# Altium PCB MB1360.PcbDoc (part 2 of 3)
Units mil, origin at the board's own origin, x right, y up, seen from the top; angles counter-clockwise.
Board outline 2760.94 x 3253.06 mil, 2 copper layers (Top Layer, Bottom Layer), stack 61.811 mil thick; 138 components, 141 nets, 535 pads, 416 vias.
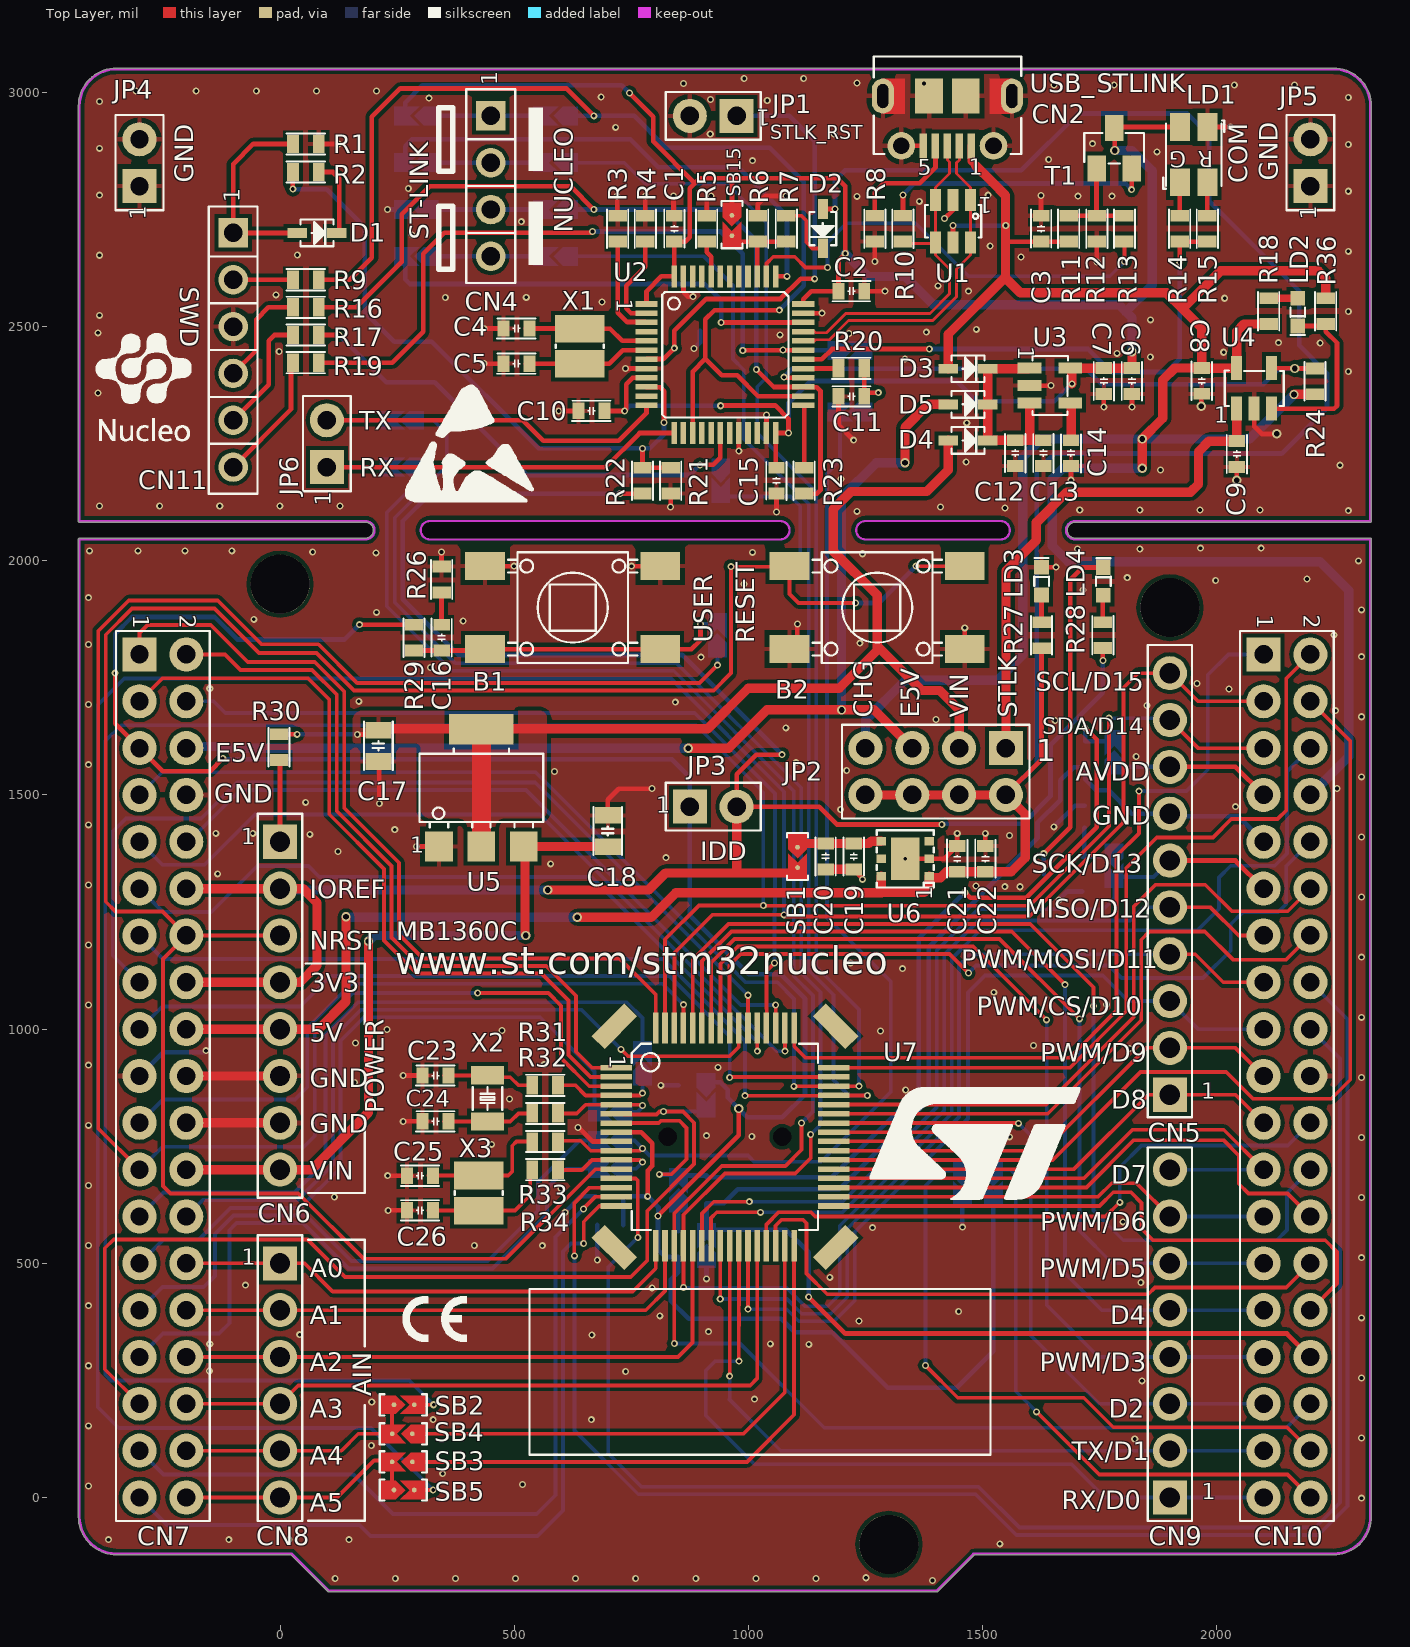
[diagram p0: Top Layer view]

## Via types
v1: diameter 15, hole 8, Top Layer to Bottom Layer, tented both sides, 398 vias
v2: diameter 20, hole 12, Top Layer to Bottom Layer, tented both sides, 18 vias

## Nets (pads, with @x,y where several pads share a name; then routed paths per layer and width w, separated by ;. In a path a pad name is that pad's centre, name@x,y a point inside that pad or via, vN(x,y) a via of type N, cw(c..) or ccw(c..) an arc to the next point about the centre after c; other vN are vias at no path point) (continued)
3V3_STLK: (continued)
  Top Layer w10: C10.2@696.5,2320 v1(736,2320) 739,2323 739,2377 752.79,2390.79 U2.9@782.68,2390.79 ; v1(746,2999) 796.64,2948.36 796.64,2895.4 885.94,2806.09 ; U2.1@782.68,2548.27 782.68,2575.68 814.32,2607.32 U2.48@841.73,2607.32 842,2607.59 C1.2@842,2681.44 865.44,2681.44 875,2691 875,2795.15 885.94,2806.09 ; v1(941,2331) 941.68,2331.68 1057.32,2331.68 1085.62,2303.38 v1(1085.62,2272.68) U2.24@1058.27,2272.68 C15.2@1058.27,2204.23 ; SB15.1@965,2737.4 965,2816.76 ; U2.36@1117.32,2548.27 1117.32,2558.32 1134.68,2575.68 C2.2@1188.5,2575.68 ; C2.2@1192.44,2575.68 1192.44,2641.55 v1(1206.89,2656) 1206.89,2800.07 1190.2,2816.76 965,2816.76 ; v2(1782,2876) 1782,2920.37 1787.68,2926.06 LD1.4@1921.47,2926.06 ; 885.94,2806.09 896.61,2816.76 965,2816.76
  Top Layer w16: U3.5@1689.28,2411.4 U3.5@1690.77,2409.91
  Top Layer w20: U3.5@1689.28,2411.4 C6.2@1818.09,2411.4 ; v1(1690.77,2377.77) U3.5@1690.77,2409.91 ; C6.2@1819.02,2411.5 v2(1819.02,2445.98)
  Bottom Layer w10: SB6.2@267.25,2950 267.25,2978.25 304,3015 730,3015 v1(746,2999) ; v1(736,2320) 747,2331 v1(941,2331) ; v1(1085.62,2272.68) 1085.62,2336.76 1132.86,2384 1444.36,2384 1487.68,2340.68 1653.68,2340.68 v1(1690.77,2377.77)
  Bottom Layer w20: v1(1206.89,2656) 1255.89,2607 1335,2607 1395,2547 1790.92,2547 1806,2531.92 ; v2(1782,2876) 1818.79,2876 1862,2832.79 1862,2587.92 1806,2531.92 ; v2(1819.02,2445.98) 1819.02,2518.91 1806,2531.92
5V: C21.2 C22.2 CN6.5 CN7.18 D2.1 JP2.2 JP2.4 JP2.6 JP2.8 R27.1 U6.1 U6.6 | length 5940.5
  Top Layer w10: D2.1@1159,2751.13 v1(1184.87,2751.13) ; JP2.2@1550,1500 1626,1576 R27.1@1626,1813.44
  Top Layer w20: CN7.18@-200,1000 CN6.5@0,1000 82,1000 141,1059 v2(141,1240) ; v2(635,1239) 793,1239 845.32,1291.32 1284.32,1291.32 1285,1292 ; JP2.8@1250,1500 JP2.6@1350,1500 JP2.4@1450,1500 JP2.2@1550,1500 1591,1459 1591,1366 1561.13,1336.13 C22.2@1506,1336.13 C21.2@1446,1336.13 1423.13,1336.13 1410.18,1323.18 U6.1@1386.18,1323.18 ; U6.6@1283.82,1326.28 1283.82,1293.18 1285,1292 ; U6.1@1386.18,1326.28 U6.1@1386.18,1323.18 ; 1285,1292 1375.4,1292 1386.18,1302.78 U6.1@1386.18,1323.18
  Bottom Layer w10: v1(1184.87,2751.13) 1184.87,2811.99 1206.52,2833.64 1582.64,2833.64 1704,2955 1937,2955 1984,2908 1984,2768 2176,2576 2176,2460 2235.42,2400.58 2235.42,2325.42 2139,2229 1653,2229 1616,2192 1616,1566 JP2.2@1550,1500
  Bottom Layer w20: v2(141,1240) 142,1239 v2(635,1239)
5V_USB_CHG: C3.2 C8.1 CN2.1 CN10.8 D3.1 JP2.7 R11.2 R18.2 R24.2 R36.2 U1.5 U4.5 | length 5351.3
  Top Layer w10: U1.5@1437,2679.72 v1(1437,2715.69) ; 1549,2685 1552.56,2681.44 C3.2@1625,2681.44 R11.2@1684,2681.44
  Top Layer w16: CN2.1@1476.18,2886 1476.18,2852.82 1485,2844
  Top Layer w20: D3.1@1426.87,2410 1426.87,2483.61 1549,2605.73 ; 1485,2844 1520.5,2808.5 1549,2780 1549,2685 1549,2605.73 ; v2(1840.67,2197.67) v2(1840.67,2260) 1885,2304.33 1885,2385.87 1910.69,2411.56 C8.1@1968,2411.56 1968,2496.83 1926.92,2537.92 ; C8.1@1968,2411.31 U4.5@2042.6,2411.31 2042.6,2489.69 2058.35,2505.44 R18.2@2111,2505.44 ; v2(2165,2355) 2165.44,2355.44 R24.2@2210,2355.44 ; R36.2@2232.64,2560.56 2232.64,2603.36 2217,2619 2008,2619 1926.92,2537.92 ; 1549,2605.73 1549,2604 1581,2572 1892.83,2572 1926.92,2537.92
  Bottom Layer w10: v1(1437,2715.69) v1(1549.59,2715.69)
  Bottom Layer w20: JP2.7@1250,1600 1250,1660 1335,1745 1532,1745 1586,1799 1586,2221 1625,2260 v2(1840.67,2260) 2070,2260 v2(2165,2355) ; v2(1840.67,2197.67) 1671.67,2197.67 1649,2175 1649,2032 1683,1998 2220.61,1998 2282,1936.61 2282,1582 CN10.8@2200,1500
5V_USB_STLK: C9.2 JP2.1 U4.1 | length 1118.8
  Top Layer w20: JP2.1@1550,1600 1550,1978.87 1614.95,2043.82 1614.95,2081.95 1679.63,2146.63 1944,2146.63 1961,2163.63 1961,2233 1983.56,2255.56 C9.2@2043,2255.56 2043,2324.29 U4.1@2042.6,2324.69
AGND: C29.1 C33.1 CN5.7 CN10.9 CN10.32 SB31.2 | length 3401.1
  Top Layer w10: v1(1128.86,428) 1206.86,350 2150,350 CN10.32@2200,300
  Bottom Layer w10: C33.1@910.75,624.47 910.75,571.72 1080.28,571.72 1128.86,523.14 v1(1128.86,428) ; C33.1@910.75,628.41 947.88,628.41 977.47,658 1194,658 1385,849 1385,1175.24 1617.2,1407.44 1617.2,1440.2 1666,1489 1666,1531 1694.5,1559.5 C29.1@1719,1559.5 1719,1534 1743,1510 1769,1510 1819,1460 CN5.7@1900,1460 1905.5,1454.5 2045.5,1454.5 CN10.9@2100,1400
AIN_1: R2.2 R21.2 R22.2 U2.10 | length 1407.3
  Top Layer w10: v1(27.44,2793.56) R2.2@27.44,2830 ; R22.2@774,2198.56 R21.2@834,2198.56 ; R22.2@774,2202.5 v1(774,2240) ; U2.10@782.68,2371.1 783.46,2370.32 811.68,2370.32 820,2362.01 v1(820,2295)
  Bottom Layer w10: v1(27.44,2793.56) 99.44,2793.56 181,2712 181,2531 244,2468 324,2468 552,2240 v1(774,2240) 790,2240 820,2270 v1(820,2295)
AVDD: C29.2 C33.2 SB21.2 SB28.2 U7.7 | length 2054
  Top Layer w8: U7.7@717.66,799.39 808.33,799.39 813.44,804.5 852.86,804.5 868.17,789.19 868.17,722.17 836,690 v1(810,690)
  Top Layer w10: v1(1462,1292) 1473.5,1280.5 1593.25,1280.5 1743.61,1430.85 1743.61,1618.39 v1(1719,1643)
  Bottom Layer w10: v1@810.25,689.75 851,689.75 853.25,687.5 C33.2@910.75,687.5 ; C33.2@910.75,683.53 1178.52,683.53 1364,869.01 1364,1194 v1(1462,1292) ; v1(1719,1643) C29.2@1719,1614.62 1719.06,1614.69 SB21.2@1781,1614.69
E5V: CN7.6 D5.1 JP2.5 | length 2428.5
  Top Layer w20: v2(872,1600) 958,1600 1039.84,1681.84 1268.16,1681.84 JP2.5@1350,1600 ; v2(1334.45,2209.45) 1334.45,2284.41 1384.04,2334 D5.1@1426.87,2334
  Bottom Layer w20: CN7.6@-200,1600 -196.5,1603.5 -111.44,1603.5 -107.94,1600 v2(872,1600) ; v2(1199,1681.46) 1199,2135 1273.45,2209.45 v2(1334.45,2209.45)

## Text inside footprints (layer, text, board x,y; h text height)
CN4: Top Overlay "1" at 475.59,3015.55 h59.06 r90; M14-Top Assembly "1" at 474.61,2943.7 h59.06 r90; M14-Top Assembly "4" at 473.62,2630.71 h59.06 r90
CN5: Top Overlay "1" at 1966.98,839.36 h59.06; M14-Top Assembly "1" at 1919.68,852.52 h59.06 r90; M14-Top Assembly "10" at 1919.68,1731.26 h59.06 r90
CN6: Top Overlay "1" at -83,1383.11 h59.06; M14-Top Assembly "8" at -20.67,713.39 h59.06 r270; M14-Top Assembly "1" at -19.68,1407.48 h59.06 r270
CN7: Top Overlay "2" at -225.39,1885.16 h59.06 r270; Top Overlay "1" at -324.8,1885.1 h59.06 r270; M14-Top Assembly "37" at -320.87,30.91 h59.06 r270; M14-Top Assembly "38" at -219.49,30.91 h59.06 r270; M14-Top Assembly "1" at -318.9,1804.53 h59.06 r270; M14-Top Assembly "2" at -219.49,1814.37 h59.06 r270
CN8: Top Overlay "1" at -82,485.55 h59.06; M14-Top Assembly "1" at -19.68,507.48 h59.06 r270; M14-Top Assembly "6" at -20.67,12.8 h59.06 r270
CN9: Top Overlay "1" at 1968,-15 h59.06; M14-Top Assembly "8" at 1920.67,686.61 h59.06 r90; M14-Top Assembly "1" at 1919.68,-7.48 h59.06 r90
CN10: Top Overlay "2" at 2174.61,1885.16 h59.06 r270; Top Overlay "1" at 2075.2,1885.1 h59.06 r270; M14-Top Assembly "37" at 2079.13,30.91 h59.06 r270; M14-Top Assembly "38" at 2180.51,30.91 h59.06 r270; M14-Top Assembly "1" at 2081.1,1804.53 h59.06 r270; M14-Top Assembly "2" at 2180.51,1814.37 h59.06 r270
CN11: Top Overlay "1" at -74.41,2765.55 h59.06 r90; M14-Top Assembly "6" at -75,2185 h59.06 r90; M14-Top Assembly "1" at -75.39,2693.7 h59.06 r90
D1: M14-Top Assembly "K" at 124.28,2689.77 h59.06
D2: M14-Top Assembly "K" at 1148.77,2663.72 h59.06 r270
D3: M14-Top Assembly "K" at 1514.28,2399.77 h59.06
D4: M14-Top Assembly "K" at 1514.28,2246.77 h59.06
D5: M14-Top Assembly "K" at 1514.28,2323.77 h59.06
JP1: Top Overlay "1" at 1047.05,2974.61 h59.06 r180; M14-Top Assembly "1" at 985.04,2970.67 h59.06 r180
JP2: Top Overlay "1" at 1614.57,1571.65 h47.24; M14-Top Assembly "2" at 1564.37,1519.49 h39.37 r180; M14-Top Assembly "1" at 1554.53,1618.9 h39.37 r180; M14-Top Assembly "7" at 1262.4,1620.87 h39.37 r180; M14-Top Assembly "8" at 1262.4,1520.47 h39.37 r180
JP3: Top Overlay "1" at 802.95,1450.39 h59.06; M14-Top Assembly "1" at 864.96,1454.33 h59.06
JP4: Top Overlay "1" at -275.39,2727.95 h59.06 r90; M14-Top Assembly "1" at -279.33,2789.96 h59.06 r90
JP5: Top Overlay "1" at 2224.61,2727.95 h59.06 r90; M14-Top Assembly "1" at 2220.67,2789.96 h59.06 r90
JP6: Top Overlay "1" at 120,2118 h59.06 r90; M14-Top Assembly "1" at 120.67,2189.96 h59.06 r90
LD1: Top Overlay "R" at 1992.34,2886.69 h59.06 r180; Top Overlay "G" at 1935.25,2886.69 h59.06 r180; M14-Top Assembly "R" at 1990.37,2878.81 h59.06 r180; M14-Top Assembly "G" at 1931.31,2878.81 h59.06 r180; M14-Top Assembly "C1" at 1996.28,2933.93 h59.06 r180; M14-Top Assembly "A1" at 2000.21,2827.63 h59.06 r180; M14-Top Assembly "C2" at 1943.13,2827.63 h59.06 r180; M14-Top Assembly "A2" at 1941.16,2933.93 h59.06 r180
LD2: M14-Top Assembly "K" at 2165.13,2499.5 h59.06 r270
LD3: M14-Top Assembly "K" at 1633.87,1988.19 h59.06 r90
LD4: M14-Top Assembly "K" at 1765.87,1987.5 h59.06 r90
U1: Top Overlay "1" at 1521,2788 h59.06 r180; M14-Top Assembly "4" at 1407.47,2688.58 h59.06 r180; M14-Top Assembly "5" at 1442.91,2688.58 h59.06 r180; M14-Top Assembly "6" at 1480.31,2688.58 h59.06 r180; M14-Top Assembly "1" at 1478.34,2781.1 h59.06 r180; M14-Top Assembly "3" at 1407.47,2781.1 h59.06 r180; M14-Top Assembly "2" at 1442.91,2781.1 h59.06 r180
U2: Top Overlay "1" at 707,2560 h59.06 r270; M14-Top Assembly "1" at 769.88,2568.94 h59.06 r270
U3: Top Overlay "1" at 1565,2458 h59.06 r270
U4: Top Overlay "1" at 1995,2283 h59.06
U5: Top Overlay "1" at 278,1365 h59.06; M14-Top Assembly "4" at 421.14,1609.49 h59.06; M14-Top Assembly "1" at 331.57,1383.11 h59.06; M14-Top Assembly "2" at 416.22,1382.13 h59.06; M14-Top Assembly "3" at 506.77,1381.14 h59.06
U6: Top Overlay "1" at 1404,1275 h59.06 r90
U7: Top Overlay "1" at 692.13,945.2 h59.06 r270; M14-Top Assembly "64" at 826.97,1044.61 h59.06 r180; M14-Top Assembly "49" at 1121.26,1044.61 h59.06 r180; M14-Top Assembly "48" at 1225.59,894.02 h59.06 r90; M14-Top Assembly "33" at 1225.59,598.74 h59.06 r90; M14-Top Assembly "32" at 1074.02,494.41 h59.06; M14-Top Assembly "17" at 780.71,493.43 h59.06; M14-Top Assembly "16" at 675.39,643.03 h59.06 r270; M14-Top Assembly "1" at 674.41,923.54 h59.06 r270